# EAGLE board ECG_TRUE (EAGLE 9.4.1)
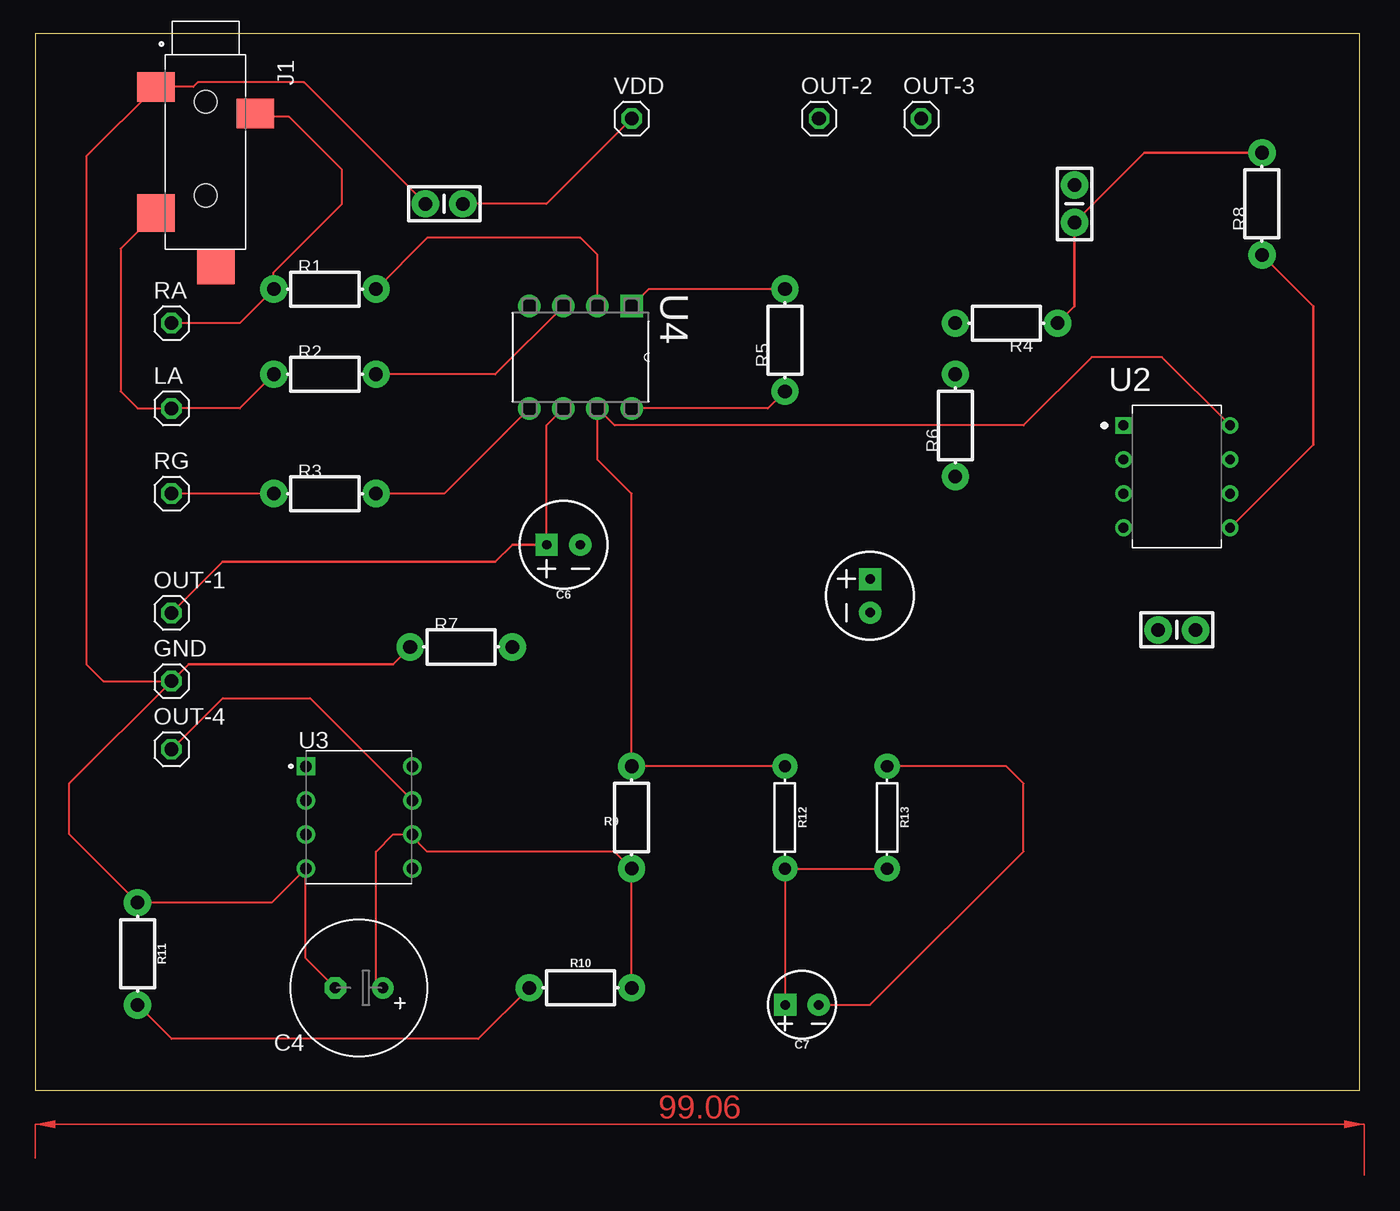
[diagram p0: board, top side]
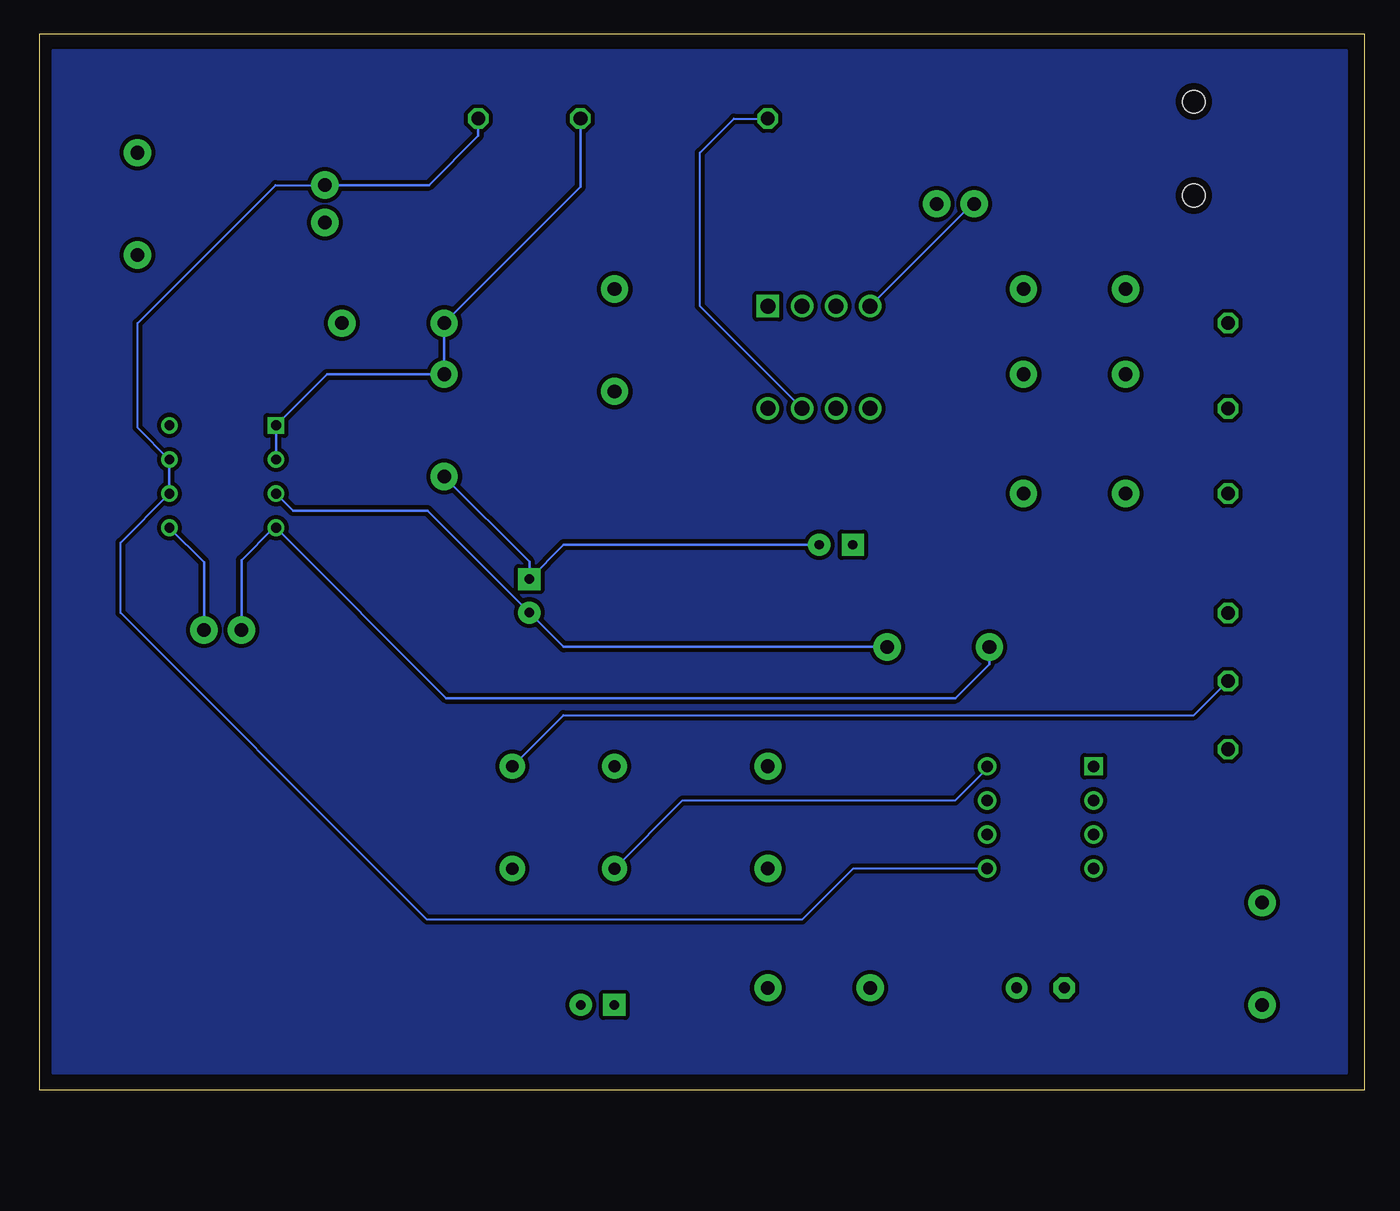
[diagram p1: board, bottom side, seen from below]

Size 98.73 x 78.73 mm. Coordinates in mm from the lower left corner, seen from the top.
Outline: 0,0 98.73,0 98.73,78.73 0,78.73 0,0
Copper layers (1*16): Top 0.07mm / dielectric 1.5mm / Bottom 0.07mm
Design rules "Advanced *": minimum track width 6mil, minimum drill 0.2mm, track to track 12mil, track to pad 10mil, pad to pad 10mil, via to via 10mil, smd to smd 10mil, copper to edge 20mil, drill to drill 10mil, minimum pad ring 10mil, minimum via ring 8mil, stop-mask expansion 4mil, vias tented up to drill 0mil, thermal gap 10mil

## Footprints (pad centres in the part's own frame; a part is rotated, then mirrored left to right if it is on the bottom)
CAP-PTH-SMALL-KIT = drill 1.016 pad 2.032: 1 -1.397,0; 2 1.397,0
E3,5-10 = drill 0.813 pad 1.6: + -1.778,0 | drill 0.813 pad 1.6 octagon: - 1.778,0
CPOL-RADIAL-2.5MM-6.5MM = drill 0.7 pad 1.651 square: 1 1.25,0 | drill 0.7 pad 1.651: 2 -1.25,0
CPOL-RADIAL-2.5MM-5MM-KIT = drill 0.7 pad 1.651 square: 1 1.25,0 | drill 0.7 pad 1.651: 2 -1.25,0
1X01 = drill 1.016 octagon: 1 0,0
CUI_SJ-3524-SMT = smd 2.2 x 2.8: 1 -1.1,-3.7; 3 0.9,3.7 | smd 2.8 x 2.8: 2 8.3,-3.7 | smd 2.6 x 2.8: 4 12.3,0.75 | hole 1.7: 0,0; 7,0
AXIAL-0.3-KIT = drill 1.016 pad 2.032: P$1 -3.81,0; P$2 3.81,0
AXIAL-0.3 = drill 0.9 pad 1.88: P$1 -3.81,0; P$2 3.81,0
DIP794W45P254L1060H508Q8 = drill 0.74 square: 1 -3.97,3.81 | drill 0.74: 2 -3.97,1.27; 3 -3.97,-1.27; 4 -3.97,-3.81; 5 3.97,-3.81; 6 3.97,-1.27; 7 3.97,1.27; 8 3.97,3.81
DIP794W47P254L991H457Q8 = drill 0.86 pad 1.21 square: 1 -3.97,3.81 | drill 0.86 pad 1.21: 2 -3.97,1.27; 3 -3.97,-1.27; 4 -3.97,-3.81; 5 3.97,-3.81; 6 3.97,-1.27; 7 3.97,1.27; 8 3.97,3.81
DIP254P762X508-8 = drill 1.118 square: 1 -7.62,7.62 | drill 1.118: 2 -7.62,5.08; 3 -7.62,2.54; 4 -7.62,0; 5 0,0; 6 0,2.54; 7 0,5.08; 8 0,7.62

## Placement (x,y rotation side)
C1  47nF  [CAP-PTH-SMALL-KIT]  85.09,34.29 180 top
C2  0.1uF  [CAP-PTH-SMALL-KIT]  77.47,66.04 270 top
C3  0.01uF  [CAP-PTH-SMALL-KIT]  30.48,66.04 180 top
C4  220u  [E3,5-10]  24.13,7.62 180 top
C5  100uF  [CPOL-RADIAL-2.5MM-6.5MM]  62.23,36.83 90 top
C6  100uF  [CPOL-RADIAL-2.5MM-6.5MM]  39.37,40.64 180 top
C7  10uF  [CPOL-RADIAL-2.5MM-5MM-KIT]  57.15,6.35 180 top
GND  [1X01]  10.16,30.48 0 top
J1  SJ-3524-SMT  [CUI_SJ-3524-SMT]  12.7,73.66 270 top
LA  [1X01]  10.16,50.8 0 top
OUT-1  [1X01]  10.16,35.56 0 top
OUT-2  [1X01]  58.42,72.39 0 top
OUT-3  [1X01]  66.04,72.39 0 top
OUT-4  [1X01]  10.16,25.4 0 top
R1  100k  [AXIAL-0.3-KIT]  21.59,59.69 0 top
R2  100k  [AXIAL-0.3-KIT]  21.59,53.34 0 top
R3  100k  [AXIAL-0.3-KIT]  21.59,44.45 0 top
R4  18.2k  [AXIAL-0.3-KIT]  72.39,57.15 180 top
R5  1k  [AXIAL-0.3-KIT]  55.88,55.88 90 top
R6  33k  [AXIAL-0.3-KIT]  68.58,49.53 90 top
R7  33k  [AXIAL-0.3-KIT]  31.75,33.02 0 top
R8  10k  [AXIAL-0.3-KIT]  91.44,66.04 90 top
R9  10k  [AXIAL-0.3-KIT]  44.45,20.32 90 top
R10  47  [AXIAL-0.3-KIT]  40.64,7.62 0 top
R11  20  [AXIAL-0.3-KIT]  7.62,10.16 270 top
R12  10k  [AXIAL-0.3]  55.88,20.32 270 top
R13  10k  [AXIAL-0.3]  63.5,20.32 270 top
RA  [1X01]  10.16,57.15 0 top
RG  [1X01]  10.16,44.45 0 top
U2  OPA2337PA  [DIP794W45P254L1060H508Q8]  85.09,45.72 0 top
U3  MAX954EPA  [DIP794W47P254L991H457Q8]  24.13,20.32 0 top
U4  INA122P  [DIP254P762X508-8]  36.83,50.8 270 top
VDD  [1X01]  44.45,72.39 0 top

## Library data of the parts
C1-C3 = SparkFun-Capacitors; PROD_ID: CAP-08370
C4 = BeagleBone_Blue_R3
C5 C6 = SparkFun-Capacitors; PROD_ID: CAP-08439
C7 = SparkFun-Capacitors; PROD_ID: CAP-08440
GND LA OUT-1-OUT-4 RA RG VDD = pinhead
J1 = SJ-3524-SMT; CUI_PURCHASE_URL: https://www.cui.com/product/interconnect/connectors/audio-connectors/jacks/sj-352x-smt-series?utm_source=snapeda.com&utm_medium=referral&utm_campaign=snapedaBOM; DESCRIPTION: 3.5 mm, Stereo, Right Angle, Surface Mount _SMT_, Audio Jack Connector; DIGI-KEY_PART_NUMBER: CP-3524SJCT-ND; DIGI-KEY_PURCHASE_URL: https://www.digikey.com/product-detail/en/cui-devices/SJ-3524-SMT-TR/CP-3524SJCT-ND/669705?utm_source=snapeda&utm_medium=aggregator&utm_campaign=symbol; MF: CUI Devices; MP: SJ-3524-SMT-TR; PACKAGE: None
R1-R4 R6 R7 = SparkFun-Resistors; PROD_ID: RES-12183; VALUE: 10k
R5 = SparkFun-Resistors; PROD_ID: RES-12182
R8-R11 = SparkFun-Resistors; PROD_ID: RES-12183
R12 R13 = SparkFun-Resistors; PROD_ID: RES-08375
U2 = OPA2337PA; AVAILABILITY: Unavailable; DESCRIPTION: MicroSIZE, Single-Supply CMOS Operational Amplifier MicroAmplifier Series 8-PDIP; MF: Texas Instruments; MP: OPA2337PA; PACKAGE: DIP-8 Texas Instruments; PRICE: None
U3 = MAX954EPA; DESCRIPTION: Op Amp Comparator and Reference 8-Pin PDIP N; DIGI-KEY_PART_NUMBER: MAX954EPA+-ND; DIGI-KEY_PURCHASE_URL: https://www.digikey.com/product-detail/en/maxim-integrated/MAX954EPA-/MAX954EPA--ND/1495015?utm_source=snapeda&utm_medium=aggregator&utm_campaign=symbol; MF: Maxim Integrated; MP: MAX954EPA+; PACKAGE: PDIP-8 Maxim
U4 = INA122P; DESCRIPTION: SP Amp INSTR Amp Single R-R O/P ±18V/36V 8-Pin PDIP Tube; DIGI-KEY_PART_NUMBER: INA122P-ND; DIGI-KEY_PURCHASE_URL: https://www.digikey.com/product-detail/en/texas-instruments/INA122P/INA122P-ND/266168?utm_source=snapeda&utm_medium=aggregator&utm_campaign=symbol; MF: Texas Instruments; MP: INA122P; PACKAGE: PDIP-8 Burr Brown

## Nets
N$1: J1.3 R1.P$1 RA.1
N$2: C7.1 R12.P$2 R13.P$2 U3.8
N$3: C2.2 R4.P$1 R8.P$2
N$4: R1.P$2 U4.2
N$6: R2.P$2 U4.3
N$7: R3.P$1 RG.1
N$8: R3.P$2 U4.5
N$9: C6.1 OUT-1.1 U4.6
N$10: R5.P$2 U4.1
N$11: R5.P$1 U4.8
N$12: C5.1 C6.2 R6.P$1
N$13: C5.2 R7.P$2 U2.3
N$15: OUT-2.1 R4.P$2 R6.P$2 U2.1 U2.2
N$16: C3.1 R9.P$2 R12.P$1 U2.8 U4.7 VDD.1
N$17: C2.1 OUT-3.1 U2.6 U2.7 U3.5
N$18: R10.P$1 R11.P$2
N$19: C1.1 R8.P$1 U2.5
N$20: C4.+ R9.P$1 R10.P$2 U3.6
N$21: OUT-4.1 U3.7
N$22: J1.2 LA.1 R2.P$1
N$23: C1.2 C3.2 C4.- C7.2 GND.1 J1.1 R7.P$1 R11.P$1 R13.P$1 U2.4 U3.4 U4.4

## Tracks (layer width: path | path; a pad name or v marks a point on that pad's centre or on a via)
GND
  pour Bottom: 1.27,77.47 97.79,77.47 97.79,2.54 97.79,1.27 1.27,1.27
N$1
  Top 0.152: RA.1 15.24,57.15 R1.P$1 17.78,60.96 22.86,66.04 22.86,68.58 18.92,72.52 16.64,72.52 J1.3
N$2
  Top 0.152: C7.1 55.88,6.37 R12.P$2 R13.P$2
  Bottom 0.152: R12.P$2 50.8,21.59 30.48,21.59 28.1,23.97 U3.8
N$3
  Top 0.2: R8.P$2 82.68,69.85 C2.2 77.47,58.42 R4.P$1
N$4
  Top 0.152: U4.2 41.91,62.23 40.64,63.5 29.21,63.5 R1.P$2
N$6
  Top 0.152: R2.P$2 34.29,53.34 U4.3
N$7
  Top 0.152: R3.P$1 RG.1
N$8
  Top 0.152: U4.5 30.48,44.45 R3.P$2
N$9
  Top 0.152: U4.6 38.12,49.55 C6.1
  Top 0.2: C6.1 35.57,40.65 34.29,39.37 13.97,39.37 OUT-1.1
N$10
  Top 0.152: U4.1 45.72,59.69 R5.P$2
N$11
  Top 0.152: R5.P$1 54.61,50.8 U4.8
N$12
  Bottom 0.2: C6.2 59.67,40.64 C5.1 62.23,39.37 R6.P$1
N$13
  Bottom 0.2: R7.P$2 59.67,33.02 C5.2 69.83,43.18 79.85,43.18 U2.3
N$15
  Bottom 0.2: U2.2 U2.1 77.31,53.34 R6.P$2 R4.P$2 58.42,67.31 OUT-2.1
N$16
  Top 0.152: VDD.1 38.1,66.04 C3.1 | U2.8 83.98,54.61 78.74,54.61 73.66,49.53 43.18,49.53 U4.7 41.91,46.99 44.45,44.45 R9.P$2 R12.P$1
  Bottom 0.152: U4.7 49.53,58.42 49.53,69.85 46.99,72.39 VDD.1
N$17
  Bottom 0.152: U2.7 91.44,49.37 91.44,57.15 81.15,67.44 C2.1 | U2.6 92.71,40.8 92.71,35.56 72.39,15.24 72.31,15.16 69.85,12.7 41.91,12.7 38.1,16.51 U3.5
  Bottom 0.2: C2.1 69.72,67.44 66.04,71.12 OUT-3.1 | U2.6 U2.7
N$18
  Top 0.152: R10.P$1 33.02,3.81 10.16,3.81 R11.P$2
N$19
  Top 0.2: U2.5 95.25,48.1 95.25,58.42 R8.P$1
  Bottom 0.2: C1.1 86.49,39.34 U2.5
N$20
  Top 0.152: R10.P$2 R9.P$1 43.18,17.78 29.21,17.78 27.94,19.05 | C4.+ 25.4,8.13 25.4,17.78 26.67,19.05 27.94,19.05 | 27.94,19.05 U3.6
N$21
  Top 0.152: OUT-4.1 13.97,29.21 20.48,29.21 U3.7
N$22
  Top 0.152: R2.P$1 15.24,50.8 LA.1 7.62,50.8 6.35,52.07 6.35,62.71 J1.2
N$23
  Top 0.152: C3.2 20.03,75.09 12.11,75.09 11.77,74.76 J1.1 3.81,69.57 3.81,31.75 5.08,30.48 GND.1 2.54,22.86 2.54,19.05 R11.P$1 17.62,13.97 U3.4 20.16,9.81 C4.- | C7.2 62.23,6.35 73.66,17.78 73.66,22.86 72.39,24.13 R13.P$1
  Top 0.2: GND.1 11.43,31.75 26.67,31.75 R7.P$1
  Bottom 0.152: R13.P$1 59.69,27.94 12.7,27.94 GND.1 | U4.4 29.21,66.04 C3.2
  Bottom 0.2: C1.2 83.69,39.5 81.28,41.91 U2.4 68.42,29.21 30.48,29.21 27.94,31.75 R7.P$1
(copper drawn outside any net)
  shapes: Top area x2